# Altium PCB SAC_Dekoder.PcbDoc
Units mm, origin at the board's own origin, x right, y up, seen from the top; angles counter-clockwise.
Board outline 54.86 x 89.03 mm, 2 copper layers (Top Layer, Bottom Layer); 29 components, 26 nets, 173 pads, 4 vias.
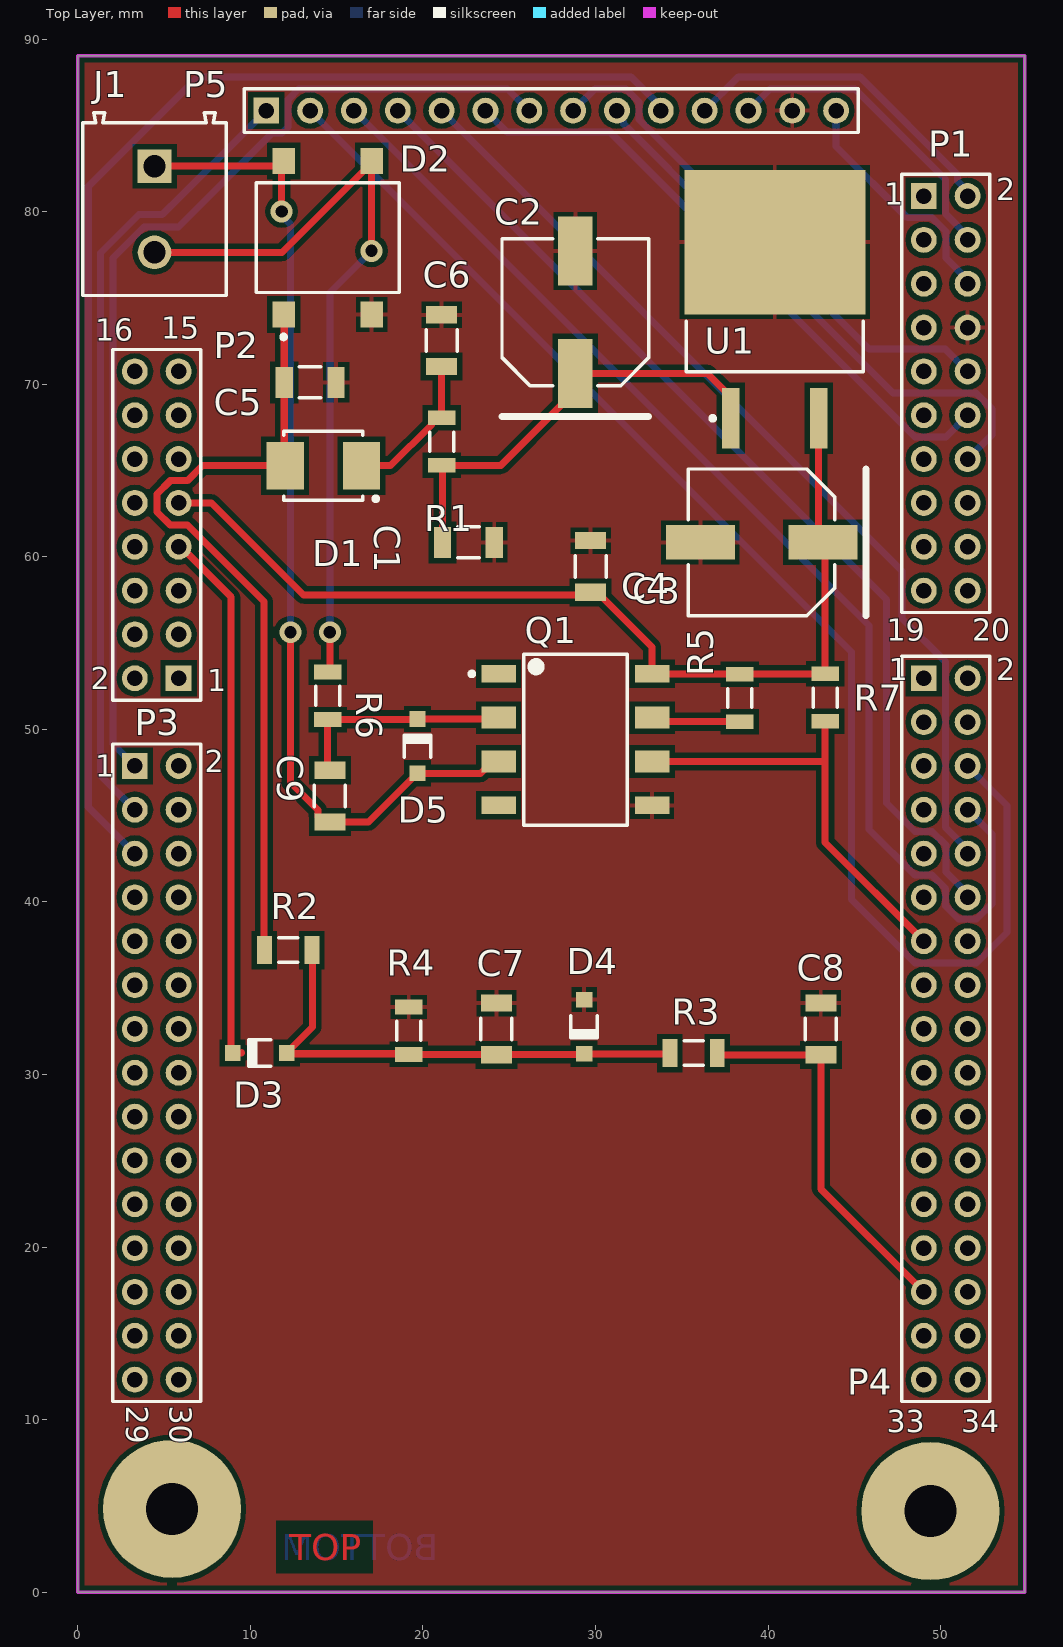
[diagram p0: Top Layer view]
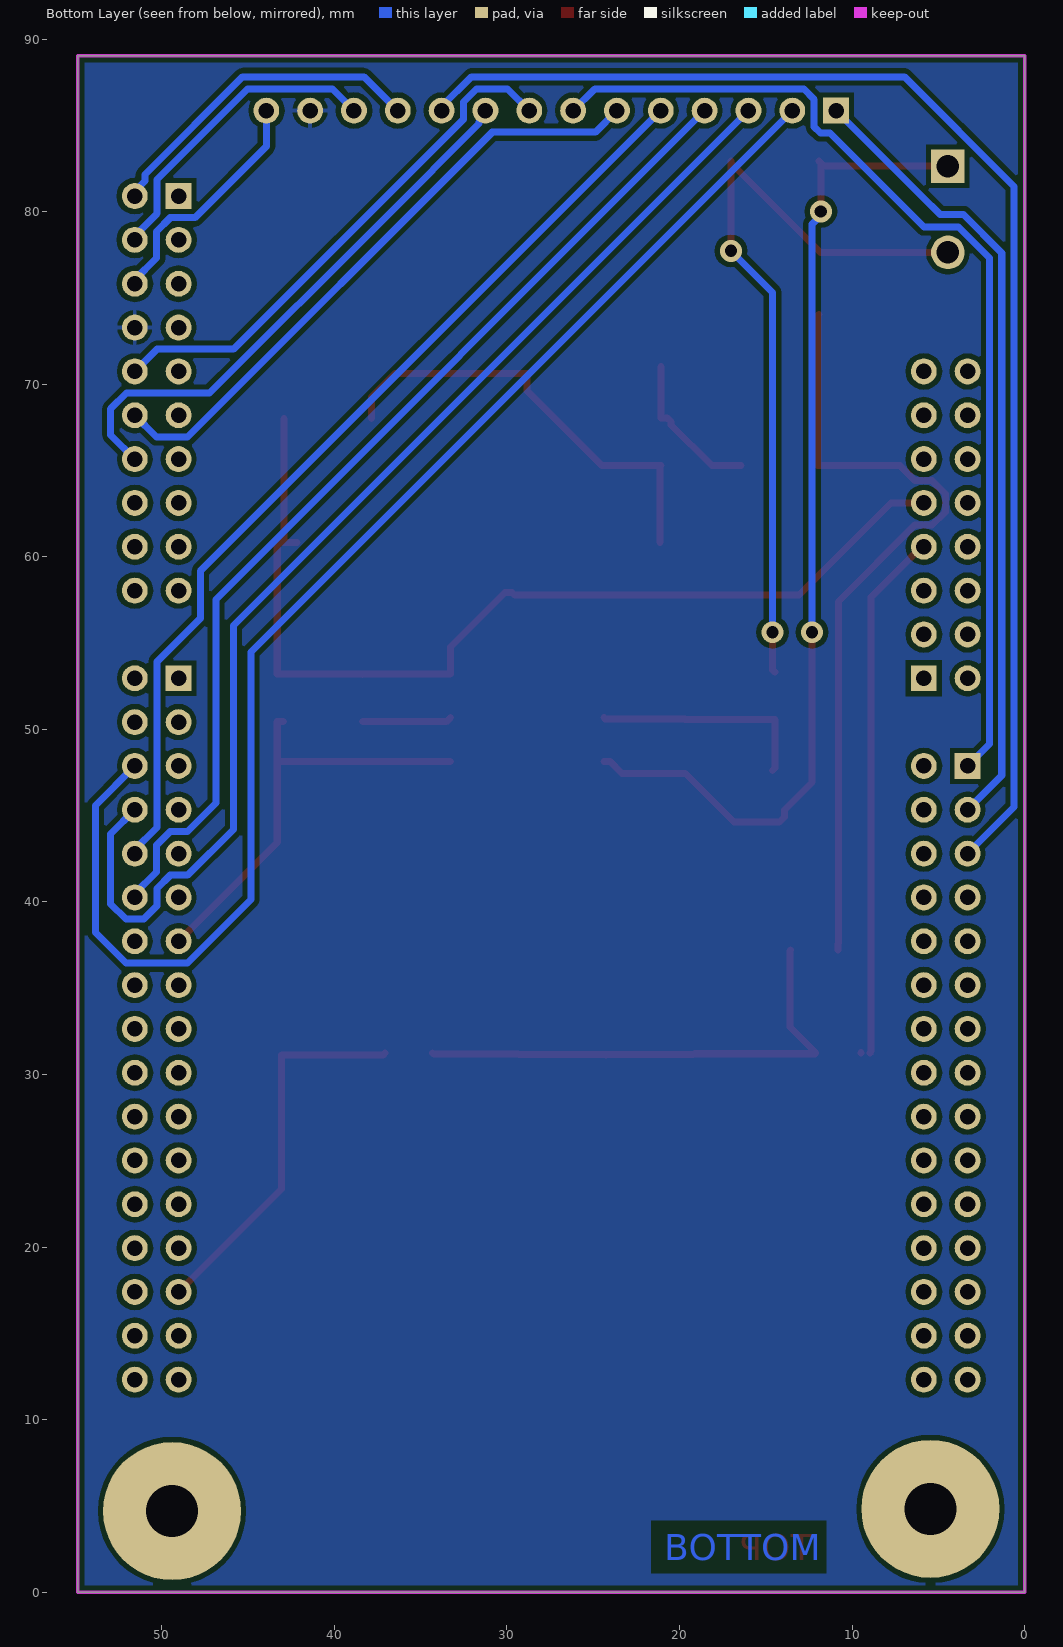
[diagram p1: Bottom Layer view, seen from below]

## Layer stack, top to bottom
Top Solder: solder mask 0.0102, Solder Resist, Dk 3.5
Top Layer: signal copper 0.0356
Dielectric 1: dielectric 0.32, FR-4, Dk 4.8
Bottom Layer: signal copper 0.0356
Bottom Solder: solder mask 0.0102, Solder Resist, Dk 3.5

## Board outline
0,0 0,89.027 54.864,89.027 54.864,0

## Design rules (kind name [scope] priority, off if disabled: settings)
Clearance [All] p1: gap=0.3 ignorepadtopadclearanceinfootprint=FALSE except(0: Arc-Hole Track-Hole SMDPad-Hole THPad-Hole Via-Hole Fill-Hole Poly-Hole Region-Hole Text-Hole)
PolygonConnect [All] p1: connectstyle=Relief reliefconductorwidth=0.254 reliefentries=4 polygonreliefangle="90 Angle" airgapwidth=0.254
RoutingVias [All] p1: holewidth=0.711 width=1.27 viastyle="Through Hole" minholewidth=0.711 minwidth=1.27 maxholewidth=0.711 maxwidth=1.27
SolderMaskExpansion [All] p1: expansion=0.102 istentingtop=FALSE
Width [All] p1: maxlimit=0.813 minlimit=0.254 preferedwidth=0.406 minimp=50.000000 maximp=50.000000 favimp=50.000000
30 further rules are at their usual default settings.

## Components (designator, comment, footprint, x,y, rotation, side; value= is the part's Value field where it differs from the comment)
C1 "CC1206KPX7R9BB104" FP-CC1206-1_25-MFG 22.63,60.833 r0 top value="100 nF"
C2 "EEEFK1C471P" PNSC-FK-V-F_V 28.829,74.168 r90 top
C3 "EEEFK1C471P" PNSC-FK-V-F_V 39.624,60.833 r180 top
C4 "CC1206KPX7R9BB104" FP-CC1206-1_25-MFG 29.718,59.436 r90 top value="100 nF"
C5 "CC1206KPX7R9BB104" FP-CC1206-1_25-MFG 13.462,70.104 r0 top value="100 nF"
C6 "CC1206KPX7R9BB104" FP-CC1206-1_25-MFG 21.082,72.517 r90 top value="100 nF"
C7 "CC1206KPX7R9BB104" FP-CC1206-1_25-MFG 24.257,32.639 r90 top value="100 nF"
C8 "CC1206KPX7R9BB104" FP-CC1206-1_25-MFG 43.053,32.639 r90 top value="100 nF"
C9 "CC1206KPX7R9BB104" FP-CC1206-1_25-MFG 14.605,46.125 r270 top value="100 nF"
D1 "MBRS130T3G" ONSC-SMB-2-403A-03_V 14.224,65.278 r180 top
D2 "DF10S" FAIR-SDIP-4_V 14.478,78.486 r0 top
D3 "1N4148W-7-F" DIOD-SOD123-2_V 10.541,31.242 r180 top
D4 "1N4148W-7-F" DIOD-SOD123-2_V 29.337,32.766 r270 top
D5 "1N4148W-7-F" DIOD-SOD123-2_V 19.685,49.022 r90 top
J1 "691213710002" 691213710002 4.445,80.137 r270 top
P1 "Header 10X2" HDR2X10 49.022,80.899 r270 top
P2 "Header 8X2" HDR2X8 5.842,52.959 r90 top
P3 "Header 15X2" HDR2X15 3.302,47.879 r270 top
P4 "Header 17X2" HDR2X17 49.022,52.959 r270 top
P5 "DISP" HDR1X14 10.922,85.852 r0 top
Q1 "6N137-300E" FP-6N137-300E-MFG 28.829,49.403 r270 top
R1 "SR1206JR-07100RL" RESC3216X65X40LL10T20 21.082,66.675 r270 top
R2 "SR1206JR-07100RL" RESC3216X65X40LL10T20 12.192,37.211 r0 top
R3 "SR1206JR-07100RL" RESC3216X65X40LL10T20 35.687,31.242 r180 top
R4 "SR1206JR-07100RL" RESC3216X65X40LL10T20 19.177,32.534 r270 top
R5 "SR1206JR-07100RL" RESC3216X65X40LL10T20 38.354,51.816 r90 top
R6 "SR1206JR-07100RL" RESC3216X65X40LL10T20 14.478,51.943 r270 top
R7 "SR1206JR-07100RL" RESC3216X65X40LL10T20 43.307,51.838 r90 top
U1 "MC7805ACD2TG" ONSC-D2PAK-3-936-03_V 40.386,74.332 r90 top (schematic designator U?)

## Footprints (in the part's own frame and the unit in brackets; to place one, negate y for a bottom-side part, rotate by r counter-clockwise, add the part's x,y. Pads: shape width x height; smd on the part's side, far side on the other; paste and mask are expansions set on the pad)
691213710002 [mm] "5,00mm - modular - green - Horizontal entry with rising cage clamp -  10,0mm height - 02p"
  rect 1.95x1.95 hole 1.3: 1(-2.5,0)
  round 1.95 hole 1.3: 2(2.5,0)
  silkscreen extent -5.6,-4.15 5,4.15, body extent -5.6,-4.15 5,4.15, height 10.05
DIOD-SOD123-2_V [mm] "SOD123, 2-Leads, Body 2.7x1.55mm, Height 1.45mm"
  rect 0.9x0.95 smd: 1(-1.575,0) 2(1.575,0)
  silkscreen extent -0.64,-0.83 0.64,0.77, body extent -1.35,-0.77 1.35,0.77, height 1.45
FAIR-SDIP-4_V [mm] "SMD, 4-Leads, Body 8.28x6.35mm, Pitch 5.1mm"
  rect 1.3x1.5 smd: 1(-2.55,-4.45) 2(2.55,-4.45) 3(2.55,4.45) 4(-2.55,4.45)
  silkscreen extent -4.14,-5.87 4.14,3.17, body extent -4.14,-3.17 4.14,3.17, height 2.84
FP-6N137-300E-MFG [mm]
  rect 1.016x2 smd paste+0 mask+0: 1(-3.81,-4.45) 4(3.81,-4.45) 5(3.81,4.45) 8(-3.81,4.45)
  rect 1.27x2 smd paste+0 mask+0: 2(-1.27,-4.45) 3(1.27,-4.45) 6(1.27,4.45) 7(-1.27,4.45)
  silkscreen extent -4.95,-6.12 4.95,3, body extent -5.05,-5.55 5.05,5.55, height 0.25
FP-CC1206-1_25-MFG [mm]
  rect 1x1.8 smd paste+0 mask+0: 1(-1.5,0) 2(1.5,0)
  silkscreen extent -0.63,-0.9 0.63,0.9, body extent -2.2,-1.25 2.2,1.25, height 0.25
HDR1X14 [mm] "Connector; Header; 14 Position"
  rect 1.5x1.5 hole 0.9: 1(0,0)
  round 1.5 hole 0.9: 2(2.54,0) 3(5.08,0) 4(7.62,0) 5(10.16,0) 6(12.7,0) 7(15.24,0) 8(17.78,0) 9(20.32,0) 10(22.86,0) 11(25.4,0) 12(27.94,0) 13(30.48,0) 14(33.02,0)
  silkscreen extent -1.27,-1.27 34.29,1.27
HDR2X8 [mm] "Connector; Header; 8x2 Position"
  rect 1.5x1.5 hole 0.9: 1(0,0)
  round 1.5 hole 0.9: 2(0,2.54) 3(2.54,0) 4(2.54,2.54) 5(5.08,0) 6(5.08,2.54) 7(7.62,0) 8(7.62,2.54) 9(10.16,0) 10(10.16,2.54) 11(12.7,0) 12(12.7,2.54) 13(15.24,0) 14(15.24,2.54) 15(17.78,0) 16(17.78,2.54)
  silkscreen extent -1.27,-1.27 19.05,3.81
HDR2X10 [mm] "Connector; Header; 10x2 Position"
  rect 1.5x1.5 hole 0.9: 1(0,0)
  round 1.5 hole 0.9: 2(0,2.54) 3(2.54,0) 4(2.54,2.54) 5(5.08,0) 6(5.08,2.54) 7(7.62,0) 8(7.62,2.54) 9(10.16,0) 10(10.16,2.54) 11(12.7,0) 12(12.7,2.54) 13(15.24,0) 14(15.24,2.54) 15(17.78,0) 16(17.78,2.54) 17(20.32,0) 18(20.32,2.54) 19(22.86,0) 20(22.86,2.54)
  silkscreen extent -1.27,-1.27 24.13,3.81
HDR2X15 [mm] "Connector; Header; 15x2 Position"
  rect 1.5x1.5 hole 0.9: 1(0,0)
  round 1.5 hole 0.9: 2(0,2.54) 3(2.54,0) 4(2.54,2.54) 5(5.08,0) 6(5.08,2.54) 7(7.62,0) 8(7.62,2.54) 9(10.16,0) 10(10.16,2.54) 11(12.7,0) 12(12.7,2.54) 13(15.24,0) 14(15.24,2.54) 15(17.78,0) 16(17.78,2.54) 17(20.32,0) 18(20.32,2.54) 19(22.86,0) 20(22.86,2.54) 21(25.4,0) 22(25.4,2.54) 23(27.94,0) 24(27.94,2.54) 25(30.48,0) 26(30.48,2.54) 27(33.02,0) 28(33.02,2.54) 29(35.56,0) 30(35.56,2.54)
  silkscreen extent -1.27,-1.27 36.83,3.81
HDR2X17 [mm] "Connector; Header; 17x2 Position"
  rect 1.5x1.5 hole 0.9: 1(0,0)
  round 1.5 hole 0.9: 2(0,2.54) 3(2.54,0) 4(2.54,2.54) 5(5.08,0) 6(5.08,2.54) 7(7.62,0) 8(7.62,2.54) 9(10.16,0) 10(10.16,2.54) 11(12.7,0) 12(12.7,2.54) 13(15.24,0) 14(15.24,2.54) 15(17.78,0) 16(17.78,2.54) 17(20.32,0) 18(20.32,2.54) 19(22.86,0) 20(22.86,2.54) 21(25.4,0) 22(25.4,2.54) 23(27.94,0) 24(27.94,2.54) 25(30.48,0) 26(30.48,2.54) 27(33.02,0) 28(33.02,2.54) 29(35.56,0) 30(35.56,2.54) 31(38.1,0) 32(38.1,2.54) 33(40.64,0) 34(40.64,2.54)
  silkscreen extent -1.27,-1.27 41.91,3.81
ONSC-D2PAK-3-936-03_V [mm] "DPAK, 3-Leads, Body 10.24x9.35mm, Pitch 2.54mm"
  rect 3.504x1.016 smd: 1(-6.313,2.54) 3(-6.313,-2.54)
  rect 8.38x10.49 smd: 4(3.9,0)
  silkscreen extent -6.44,-5.12 -0.69,5.12, body extent -6.11,-5.13 8.09,5.13, height 4.75
ONSC-SMB-2-403A-03_V [mm] "Molded, 2-Leads, Body 4.6x3.95mm"
  rect 2.159x2.743 smd: 1(-2.21,0) 2(2.21,0)
  silkscreen extent -3.16,-2 2.3,2.05, body extent -2.3,-1.97 2.3,1.97, height 2.47
PNSC-FK-V-F_V [mm] "CAPAE, 2-Leads, Body 8.50x8.50mm"
  rect 4x2 smd: 1(-3.55,0) 2(3.55,0)
  silkscreen extent -6.05,-4.25 4.25,4.25, body extent -5,-4.25 5,4.25, height 10.5
RESC3216X65X40LL10T20 [mm] "Chip Resistor, 2-Leads, Body 3.20x1.60mm, IPC High Density"
  rect 0.85x1.6 smd: 1(-1.375,0) 2(1.375,0)
  silkscreen extent -0.55,-0.7 0.55,0.7, body extent -1.65,-0.85 1.65,0.85, height 0.65

## Part data
C1 C4 C5 C6 C7 C8 C9: library part CMP-03422-000130-1, "CC1206 100 nF X7R 10.00%50 V", Capacitance="100 nF", Manufacturer=Yageo, Package=CC1206-1.25, Temperature="-55°C to +125°C", Temperature Characteristic=X7R, Temperature Coefficient=15%, Temperature Range High=+125°C, Temperature Range Low=-55°C, Tolerance=0.1, Voltage Rating="50 V", Automotive=No, Automotive Grade=NA, Category=Cap, ComponentLink2Description=Datasheet, ComponentLink2URL=http://www.yageo.com/documents/recent/UPY-NP0X7R_HV_1KV-to-3KV_11.pdf, Device Class L1="Passive Components", Device Class L2=Capacitors, Device Class L3="Ceramic Capacitors", Footprint Url=http://www.yageo.com/exep/pages/download/literatures/UPY-C_GEN_24.pdf, Height=1.45mm, Lead Free=Yes, Manufacturer Part Number=CC1206KPX7R9BB104, Material=Ceramic, Mouser Description="Surface Mount Ceramic Multilayer Capacitor 0.1uF 10% X7R 50V 1206 Paper T/R", Octopart=https://octopart.com/cc1206kpx7r9bb104-yageo-16251820, RoHS=TRUE
C2 C3: library part CMP-2000-06204-1, "Aluminum Electrolytic Capacitor, 470 uF, +/- 20%, 16 V, 2-Pin SMD (Size Code F), -55 to 105 degC, RoHS, Tape and Reel", Capacitance=470µF, Case Size/Dimension=Ø8x10.2mm, Lifetime@Temperature=2000Hrs@105°C, Manufacturer=Panasonic, Operating Temp Range=-55to+105°C, Operating Temp-Max=105°C, Package Description="2-Pin Electrolytic Aluminum Capacitor, Body 8.3 x 8.3 mm", Package Reference=FK-V-F, Rated Voltage=16V, Ripple Current=600mA, Datasheet URL=http://industrial.panasonic.com/cdbs/www-data/pdf/RDE0000/ABA0000C1181.pdf, Datasheet Version=03/2016, Impedance=0.16O, Manufacturer URL=http://www.panasonic.com/, Mounting Technology=SurfaceMount, Package URL=http://industrial.panasonic.com/cdbs/www-data/pdf/RDE0000/DME0000COL48.pdf, Series=FK, Type=Can
D1: library part CMP-1055-00363-1, "Schottky Power Rectifier, 2-Pin SMB, Pb-Free, Tape and Reel", Manufacturer="On Semiconductor", ComponentLink1Description="Manufacturer URL", ComponentLink1URL=http://www.onsemi.com/, ComponentLink2Description=Datasheet, ComponentLink2URL=http://www.onsemi.cn/pub_link/Collateral/MBRS130T3-D.PDF, ComponentLink3Description="Package Specification", ComponentLink3URL=http://www.onsemi.com/pub_link/Collateral/403A-03.PDF, Configuration=Single, DatasheetVersion="Rev. 7", IFSM Max (A)=40, Mounting Technology="Surface Mount", PackageDescription="2-Pin Small Molded Package, J-Bend Lead, Body 4.33 x 3.625 mm", PackageReference=SMB-2-403A-03, PackageVersion="Rev. J, 07/2012", Packing="Tape and Reel", PartNumber=MBRS130T3G, RoHS=TRUE
D2: library part CMP-2000-06153-1, "Bridge Rectifier, 1.5 A, 1000 V, 4-Pin SDIP, RoHS, Tape and Reel", Manufacturer=FairchildSemiconductor, Operating Temperature=-55to150°C, Package=4SDIPSMD, Package Description="4-Pin Surface Mount Device, Body 8.28 x 6.35 mm, Pitch 5.1 mm", Package Reference="SDIP 4L", Peak Average Forward Current=1.5@Ta=40CA, Peak Forward Voltage=1.1@1AV, Peak Reverse Current=5uA, Peak Reverse Repetitive Voltage=1000V, Bridge Type=SinglePhase, Category=BridgeRectifier, Configuration=Single, Datasheet URL=http://www.farnell.com/datasheets/1941063.pdf, Datasheet Version="Rev. 1.5, 05/2015", Manufacturer URL=https://www.fairchildsemi.com/, Mounting=SurfaceMount, Mounting Technology=SurfaceMount, Packaging=Tape&Reel
D3 D4 D5: library part CMP-2000-04932-2, "Fast Switching Diode, 100 V, 0.15 A, -65 to 150 degC, 2-Pin?SOD123, RoHS, Tape and Reel", If - Forward Current=0.15A, Ir - Reverse Current=1uA, Manufacturer=DiodesIncorporated, Max Surge Current=2A, Maximum Operating Temperature=+150C, Minimum Operating Temperature=-65C, Operating Temperature Range=-65Cto+150C, Package / Case=SOD-123, Package Reference=SOD123-2, Peak Reverse Voltage=100V, Vf - Forward Voltage=1.25V, Brand=DiodesIncorporated, Configuration=Single, Datasheet URL=http://www.farnell.com/datasheets/1915529.pdf, Datasheet Version="Rev. 24-2, 10/2013", Factory Pack Quantity=3000, Height=1.25mm, Length=2.85mm, Manufacturer URL=http://www.diodes.com/, Mounting Style=SMD/SMT, Package URL=http://www.diodes.com/datasheets/ds18004.pdf, Packaging=Reel, Product=SwitchingDiodes, Product Category=Diodes-GeneralPurpose,Power,Switching, Recovery Time=4ns, RoHS=True, Series=1N4148, Type=SwitchingDiode, Unit Weight=0.000353oz, Width=1.7mm
J1: library part CMP-1502-02526-1, "Serie 213 - 5.00 mm Horizontal Entry Modular with RisingCage Clamp WR-TBL, 2 pin", Manufacturer="Wurth Elektronik", Operating Temperature=-40to105degC, Datasheet URL=http://katalog.we-online.de/em/datasheet/6912137100xx.pdf, Manufacturer URL=http://www.we-online.de, Mounting Technology=THT, Package Reference=691213710002, Packaging=Box, Part Number=691213710002, Pin Number=2, Pitch=5.00mm, Publisher=WurthElektronik
P1: "Header, 10-Pin, Dual row", LatestRevisionDate=17-Jul-2002, LatestRevisionNote="Re-released for DXP Platform.", Publisher="Altium Limited"
P2: "Header, 8-Pin, Dual row", LatestRevisionDate=17-Jul-2002, LatestRevisionNote="Re-released for DXP Platform.", Publisher="Altium Limited"
P3: "Header, 15-Pin, Dual row", LatestRevisionDate=17-Jul-2002, LatestRevisionNote="Re-released for DXP Platform.", Publisher="Altium Limited"
P4: "Header, 17-Pin, Dual row", LatestRevisionDate=17-Jul-2002, LatestRevisionNote="Re-released for DXP Platform.", Publisher="Altium Limited"
P5: library part "Header 14", "Header, 14-Pin", LatestRevisionDate=17-Jul-2002, LatestRevisionNote="Re-released for DXP Platform.", Publisher="Altium Limited"
Q1: library part CMP-18400-000015-1, "OPTOISO 3.75KV OPN COLL 8DIP GW", Ambient Temperature Range High=+85°C, Ambient Temperature Range Low=-40°C, Forward Current=10mA, Forward Voltage=1.5V, Isolation Voltage=3750Vrms, Manufacturer=Broadcom, Max Supply Voltage=5.5V, Min Supply Voltage=4.5V, Package=0, Reverse Voltage=5V, Temperature="-40°C to +85°C", Automotive=No, Category=Trans, ComponentLink2Description=Datasheet, ComponentLink2URL=https://docs.broadcom.com/docs/AV02-0940EN, Device Class L1=Optoelectronics, Device Class L2=Optocouplers, Device Class L3=unset, Digikey Description="OPTOISO 3.75KV OPN COLL 8DIP GW", Height=4.455mm, Lead Free=Yes, Manufacturer Part Number=6N137-300E, Mouser Description="High Speed Optocouplers 10 Mb/s 3750Vrms", Octopart=https://octopart.com/6n137-300e-broadcom-71125550, RoHS=TRUE, Standoff Height=0.505mm, Temperature Range High=+85°C, Temperature Range Low=-40°C, Turn Off Delay Time=50ns, Turn On Delay Time=48ns
R1 R2 R3 R4 R5 R6 R7: library part CMP-2003-04696-1, Manufacturer=Yageo, Part Number=SR1206JR-07100RL
U1: library part CMP-07128-000005-1, "IC REG LINEAR 5V 1A DPAK", Case Code (Imperial)=0603, Case Code (Metric)=1608, Max Operating Temperature="155 degC", Min Operating Temperature="-55 degC", Package Quantity=5000, Power Rating="100 mW", Resistance="22 kohm", Tolerance=1%, Voltage Rating="50 V", Case\Package=0603, ComponentLink1Description="Manufacturer URL", ComponentLink1URL=http://www.onsemi.com/, ComponentLink2Description=Datasheet, ComponentLink2URL=http://www.onsemi.com/pub_link/Collateral/MC7800-D.PDF, ComponentLink3Description="Package Specification", ComponentLink3URL=http://www.onsemi.com/pub_link/Collateral/936-03.PDF, DatasheetVersion="Rev. 27, 11/2014", Height="0.45 mm", Length="1.6 mm", Mount="Surface Mount", PackageDescription="3-Pin Flange Mount, Body 10.02 x 9.1945 mm, Pitch 2.54 mm", PackageReference=D2PAK-3-936-03, PackageVersion="Rev. E, 09/2015", Packaging="Tape and Reel", Pins=2, REACH SVHC="No SVHC", RoHSCompliant=true, Voltage Rating (DC)="50 V", Width="0.8 mm"

## Free pads (board coordinates)
  round 8 hole 3: ""(5.461,4.826) ""(49.403,4.699)

## Via types
v1: diameter 1.27, hole 0.711, Top Layer to Bottom Layer, 4 vias

## Nets (pads, with @x,y where several pads share a name; then routed paths per layer and width w, separated by ;. In a path a pad name is that pad's centre, name@x,y a point inside that pad or via, vN(x,y) a via of type N, cw(c..) or ccw(c..) an arc to the next point about the centre after c; other vN are vias at no path point)
+5: C3.1 C4.1 P2.9 Q1.8 R5.2 R7.2 U1.3 | length 58.6
  Top Layer w0.406: P2.9 7.747,63.119 13.081,57.785 29.567,57.785 C4.1 30.118,57.936 33.279,54.775 Q1.8 33.29,53.202 38.343,53.202 R5.2 38.365,53.202 43.296,53.202 R7.2 43.307,60.7 C3.1 ; C3.1@42.174,60.833 C3.1 ; U1.3 42.926,61.081 C3.1
GND: C1.2 C2.2 C3.2 C4.2 C5.2 C6.2 C7.2 C8.2 D2.2 D4.1 P1.8 P5.13 Q1.5 R4.1 U1.4
NetC1_1: C1.1 C2.1 R1.2 U1.1 | length 25.8
  Top Layer w0.406: C1.1 21.13,65.252 R1.2 24.511,65.3 28.829,69.618 C2.1 36.491,70.618 37.846,69.263 U1.1
NetC5_1: C5.1 D1.2 D2.1 R2.1 | length 46.5
  Top Layer w0.406: R2.1 10.817,37.586 10.795,37.608 10.795,57.404 6.367,61.832 5.357,61.832 4.589,62.6 4.589,63.638 5.357,64.406 6.361,64.406 7.233,65.278 D1.2 11.962,65.33 C5.1 11.962,74.002 D2.1
NetC6_1: C6.1 D1.1 R1.1 | length 8.9
  Top Layer w0.406: D1.1 18.123,65.278 20.485,67.64 20.485,67.828 20.707,68.05 R1.1 C6.1
NetC7_1: C7.1 D3.1 D4.2 R2.2 R3.2 R4.2 | length 28.9
  Top Layer w0.406: R2.2 13.589,37.189 13.589,32.74 12.116,31.267 D3.1 12.157,31.201 19.135,31.201 R4.2 19.187,31.149 24.247,31.149 C7.1 24.283,31.165 29.311,31.165 D4.2 34.261,31.191 R3.2
NetC8_1: C8.1 P4.29 R3.1 | length 22.2
  Top Layer w0.406: R3.1 37.165,31.139 C8.1 43.053,23.368 P4.29
NetC9_1: C9.1 D5.2 Q1.2 R6.2 | length 12.9
  Top Layer w0.406: C9.1 14.478,47.752 R6.2 14.492,50.582 19.67,50.582 D5.2 24.303,50.597 Q1.2
NetC9_2: C9.2 D2.4 D5.1 J1.1 Q1.3 | length 58.4
  Top Layer w0.406: J1.1 11.629,82.637 D2.4@11.811,82.819 ; v1(11.811,80.01) D2.4@11.811,82.819 ; D2.4 D2.4@11.811,82.819 ; v1(12.319,55.626) 12.319,46.911 13.908,45.322 13.908,44.922 14.205,44.625 C9.2 16.838,44.625 19.66,47.447 D5.1 23.328,47.447 24.014,48.133 Q1.3
  Bottom Layer w0.406: v1(11.811,80.01) 11.811,79.776 12.319,79.268 v1(12.319,55.626)
NetD2_3: D2.3 J1.2 R6.1 | length 45.4
  Top Layer w0.406: J1.2 11.829,77.637 D2.3@17.018,82.826 ; R6.1 14.605,53.445 v1(14.605,55.626) ; v1(17.018,77.724) D2.3@17.018,82.826 ; D2.3 17.028,82.836 D2.3@17.018,82.826
  Bottom Layer w0.406: v1(14.605,55.626) 14.605,75.311 v1(17.018,77.724)
NetD3_2: D3.2 P2.7 | length 30.7
  Top Layer w0.406: P2.7 5.969,60.579 8.89,57.658 8.89,31.318 D3.2 ; 9.474,31.242 9.474,31.267
NetP1_2: P1.2 P5.11 | length 19.3
  Bottom Layer w0.406: P5.11 38.282,87.812 45.32,87.812 50.982,82.15 50.982,81.775 51.562,81.195 P1.2
NetP1_4: P1.4 P5.12 | length 18.1
  Bottom Layer w0.406: P5.12 40.115,87.105 45.027,87.105 50.275,81.857 50.275,79.877 51.562,78.59 P1.4
NetP1_6: P1.6 P5.14 | length 14
  Bottom Layer w0.406: P5.14 43.942,83.767 48.064,79.646 49.507,79.646 50.309,78.844 50.309,77.303 51.562,76.05 P1.6
NetP1_10: P1.10 P5.8 | length 30.7
  Bottom Layer w0.406: P5.8 29.955,87.105 31.761,87.105 32.512,86.354 32.512,85.979 32.529,85.962 32.529,85.333 45.836,72.026 50.275,72.026 P1.10
NetP1_12: P1.12 P5.6 | length 36.3
  Bottom Layer w0.406: P5.6 24.875,84.599 30.85,84.599 48.503,66.946 50.309,66.946 P1.12
NetP1_14: P1.14 P5.9 | length 32.6
  Bottom Layer w0.406: P5.9 31.242,85.556 31.606,85.192 31.606,85.107 36.957,79.756 47.227,69.486 52.047,69.486 52.959,68.574 52.959,67.056 P1.14
NetP3_1: P3.1 P5.7 | length 59.6
  Bottom Layer w0.406: P3.1 2.032,49.149 2.032,77.314 3.833,79.115 5.836,79.115 11.268,84.547 11.829,84.547 12.192,84.91 12.192,86.503 12.794,87.105 24.909,87.105 P5.7
NetP3_3: P3.3 P5.1 | length 46.1
  Bottom Layer w0.406: P3.3 1.326,47.315 1.326,77.607 3.54,79.822 4.892,79.822 5.977,80.907 6.847,81.777 P5.1
NetP3_5: P3.5 P5.10 | length 76.5
  Bottom Layer w0.406: P3.5 0.605,45.496 0.605,81.458 6.958,87.812 32.054,87.812 33.782,86.083 P5.10
NetP4_6: P4.6 P5.2 | length 80.6
  Bottom Layer w0.406: P5.2 44.831,54.483 44.831,40.138 48.503,36.466 49.767,36.466 49.784,36.449 52.07,36.449 53.848,38.227 53.848,45.593 P4.6
NetP4_8: P4.8 P5.3 | length 70.3
  Bottom Layer w0.406: P5.3 45.847,56.007 45.847,44.202 48.503,41.546 49.507,41.546 50.275,40.778 50.275,39.774 51.043,39.006 52.081,39.006 52.959,39.884 52.959,43.942 P4.8
NetP4_10: P4.10 P5.5 | length 55.7
  Bottom Layer w0.406: P5.5 47.769,59.165 47.769,56.424 50.275,53.917 50.275,44.317 51.562,43.03 P4.10
NetP4_12: P4.12 P5.4 | length 59.9
  Bottom Layer w0.406: P5.4 46.863,57.531 46.863,45.726 48.503,44.086 49.507,44.086 50.309,43.284 50.309,41.743 51.562,40.49 P4.12
NetP4_13: P4.13 Q1.6 R7.1 | length 25.5
  Top Layer w0.406: Q1.6 43.307,48.133 ; R7.1@42.932,50.463 R7.1 43.307,48.133 ; P4.13 43.307,43.434 43.307,48.133
NetQ1_7: Q1.7 R5.1 | length 5.2
  Top Layer w0.406: Q1.7 33.511,50.441 R5.1
pads on no net: P1.1 P1.3 P1.5 P1.7 P1.9 P1.11 P1.13 P1.15 P1.16 P1.17 P1.18 P1.19 P1.20 P2.1 P2.2 P2.3 P2.4 P2.5 P2.6 P2.8 P2.10 P2.11 P2.12 P2.13 P2.14 P2.15 P2.16 P3.2 P3.4 P3.6 P3.7 P3.8 P3.9 P3.10 P3.11 P3.12 P3.13 P3.14 P3.15 P3.16 P3.17 P3.18 P3.19 P3.20 P3.21 P3.22 P3.23 P3.24 P3.25 P3.26 P3.27 P3.28 P3.29 P3.30 P4.1 P4.2 P4.3 P4.4 P4.5 P4.7 P4.9 P4.11 P4.14 P4.15 P4.16 P4.17 P4.18 P4.19 P4.20 P4.21 P4.22 P4.23 P4.24 P4.25 P4.26 P4.27 P4.28 P4.30 P4.31 P4.32 P4.33 P4.34 Q1.1 Q1.4

## Polygon pours and split planes (outlines as drawn)
GND on Top Layer "Top Layer-No Net" (solid, pour order 0): 0,0 0,89.027 54.864,89.027 54.864,0
GND on Bottom Layer "Top Layer-No Net1" (solid, pour order 1): 0,0 0,89.027 54.864,89.027 54.864,0

## Keep-outs
Keep-Out Layer:
  lines w0.203: 0,0 0,88.265 0,89.027 54.864,89.027 54.864,88.265 54.864,12.573 54.864,0 0,0

## Other copper
Top Layer:
  text "TOP" at 12.265,1.851 h1.52
Bottom Layer:
  text "BOTTOM" at 20.882,1.851 h1.52

## Text inside footprints (layer, text, board x,y; h text height)
P1: Top Overlay "20" at 51.816,55.118 h1.27; Top Overlay "19" at 46.863,55.118 h1.27; Top Overlay "1" at 46.736,80.391 h1.27; Top Overlay "2" at 53.213,80.645 h1.27
P2: Top Overlay "2" at 0.762,52.324 h1.27; Top Overlay "1" at 7.493,52.197 h1.27; Top Overlay "15" at 4.826,72.644 h1.27; Top Overlay "16" at 1.016,72.517 h1.27
P3: Top Overlay "1" at 1.016,47.244 h1.27; Top Overlay "2" at 7.366,47.498 h1.27; Top Overlay "29" at 2.794,10.795 h1.27 r270; Top Overlay "30" at 5.334,10.795 h1.27 r270
P4: Top Overlay "2" at 53.213,52.832 h1.27; Top Overlay "1" at 46.99,52.832 h1.27; Top Overlay "33" at 46.863,9.271 h1.27; Top Overlay "34" at 51.181,9.271 h1.27